# Altium PCB NFC.PcbDoc
Units mm, origin at the board's own origin, x right, y up, seen from the top; angles counter-clockwise.
Board outline 47.5 x 62.6 mm, 4 copper layers (Top Layer, GND, PWR, Bottom Layer), stack 1.62 mm thick; 51 components, 34 nets, 153 pads, 64 vias.
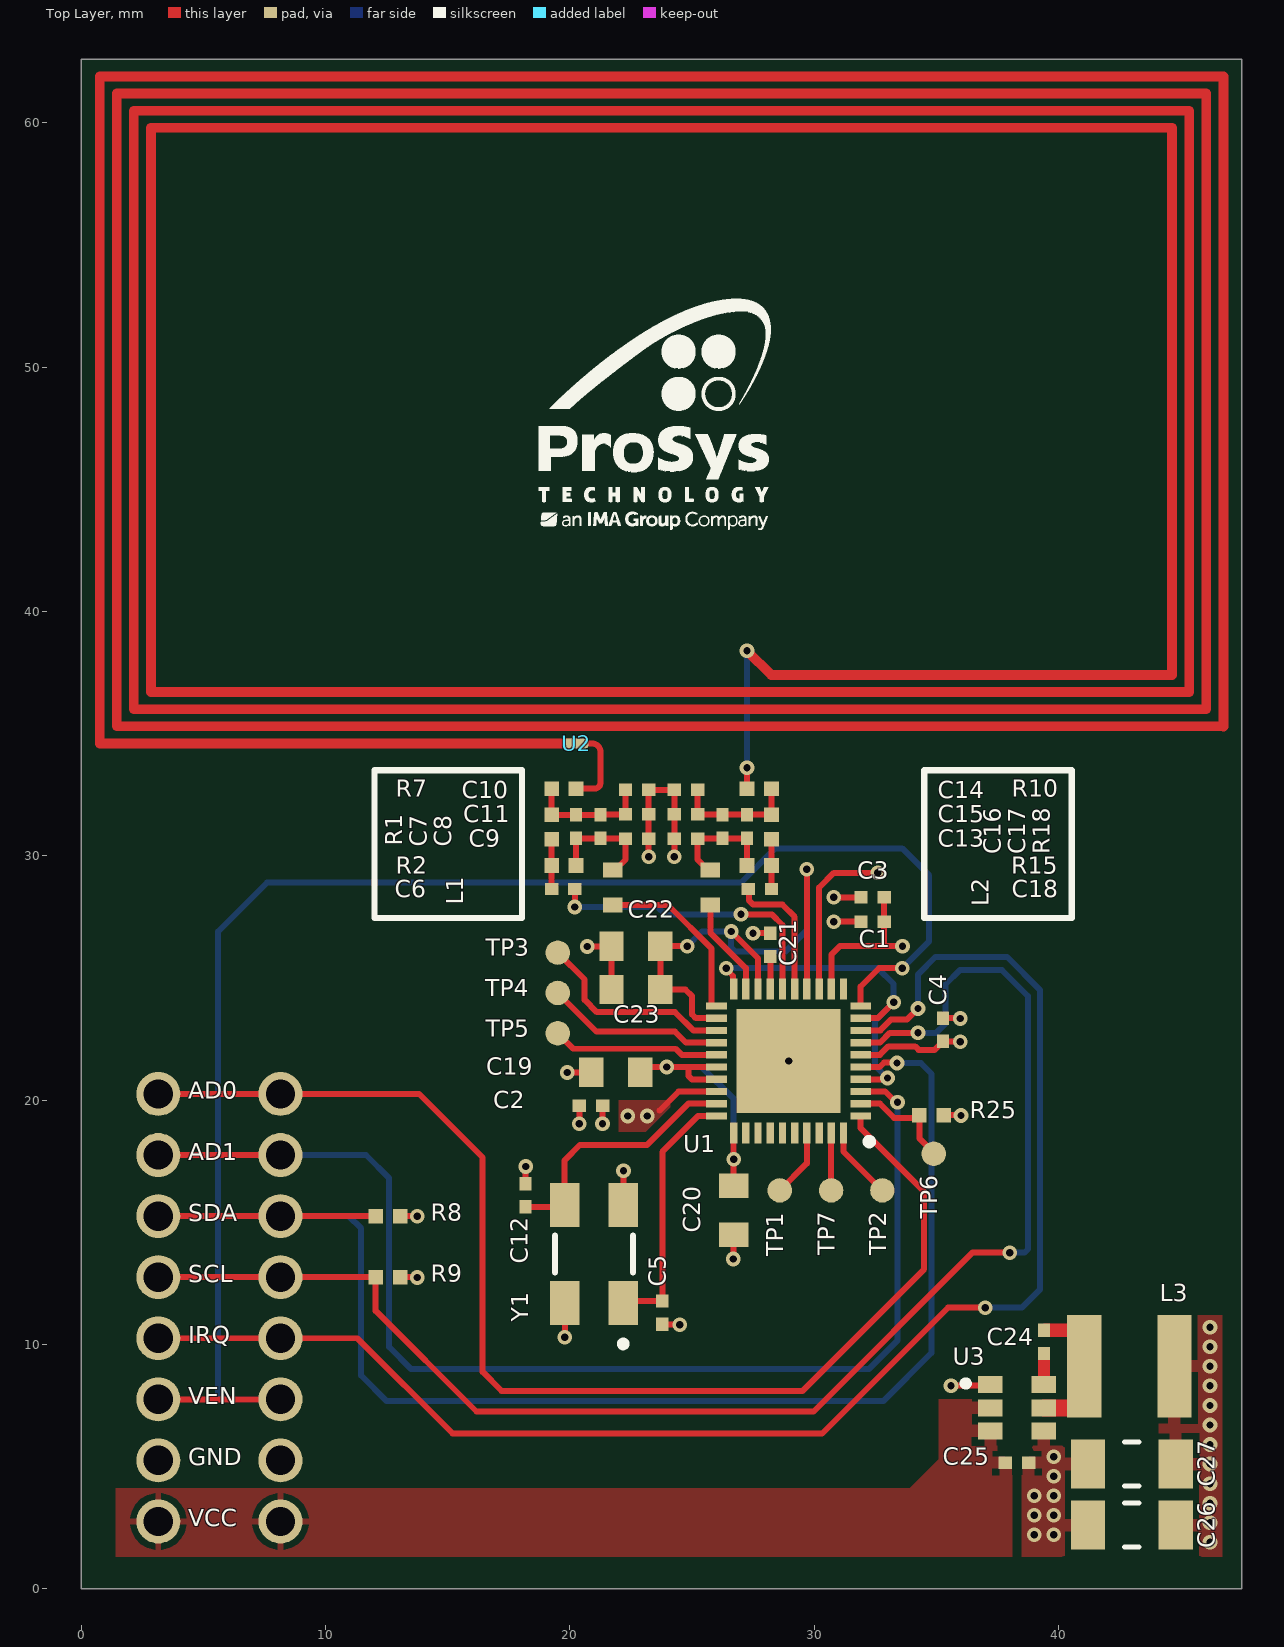
[diagram p0: Top Layer view]
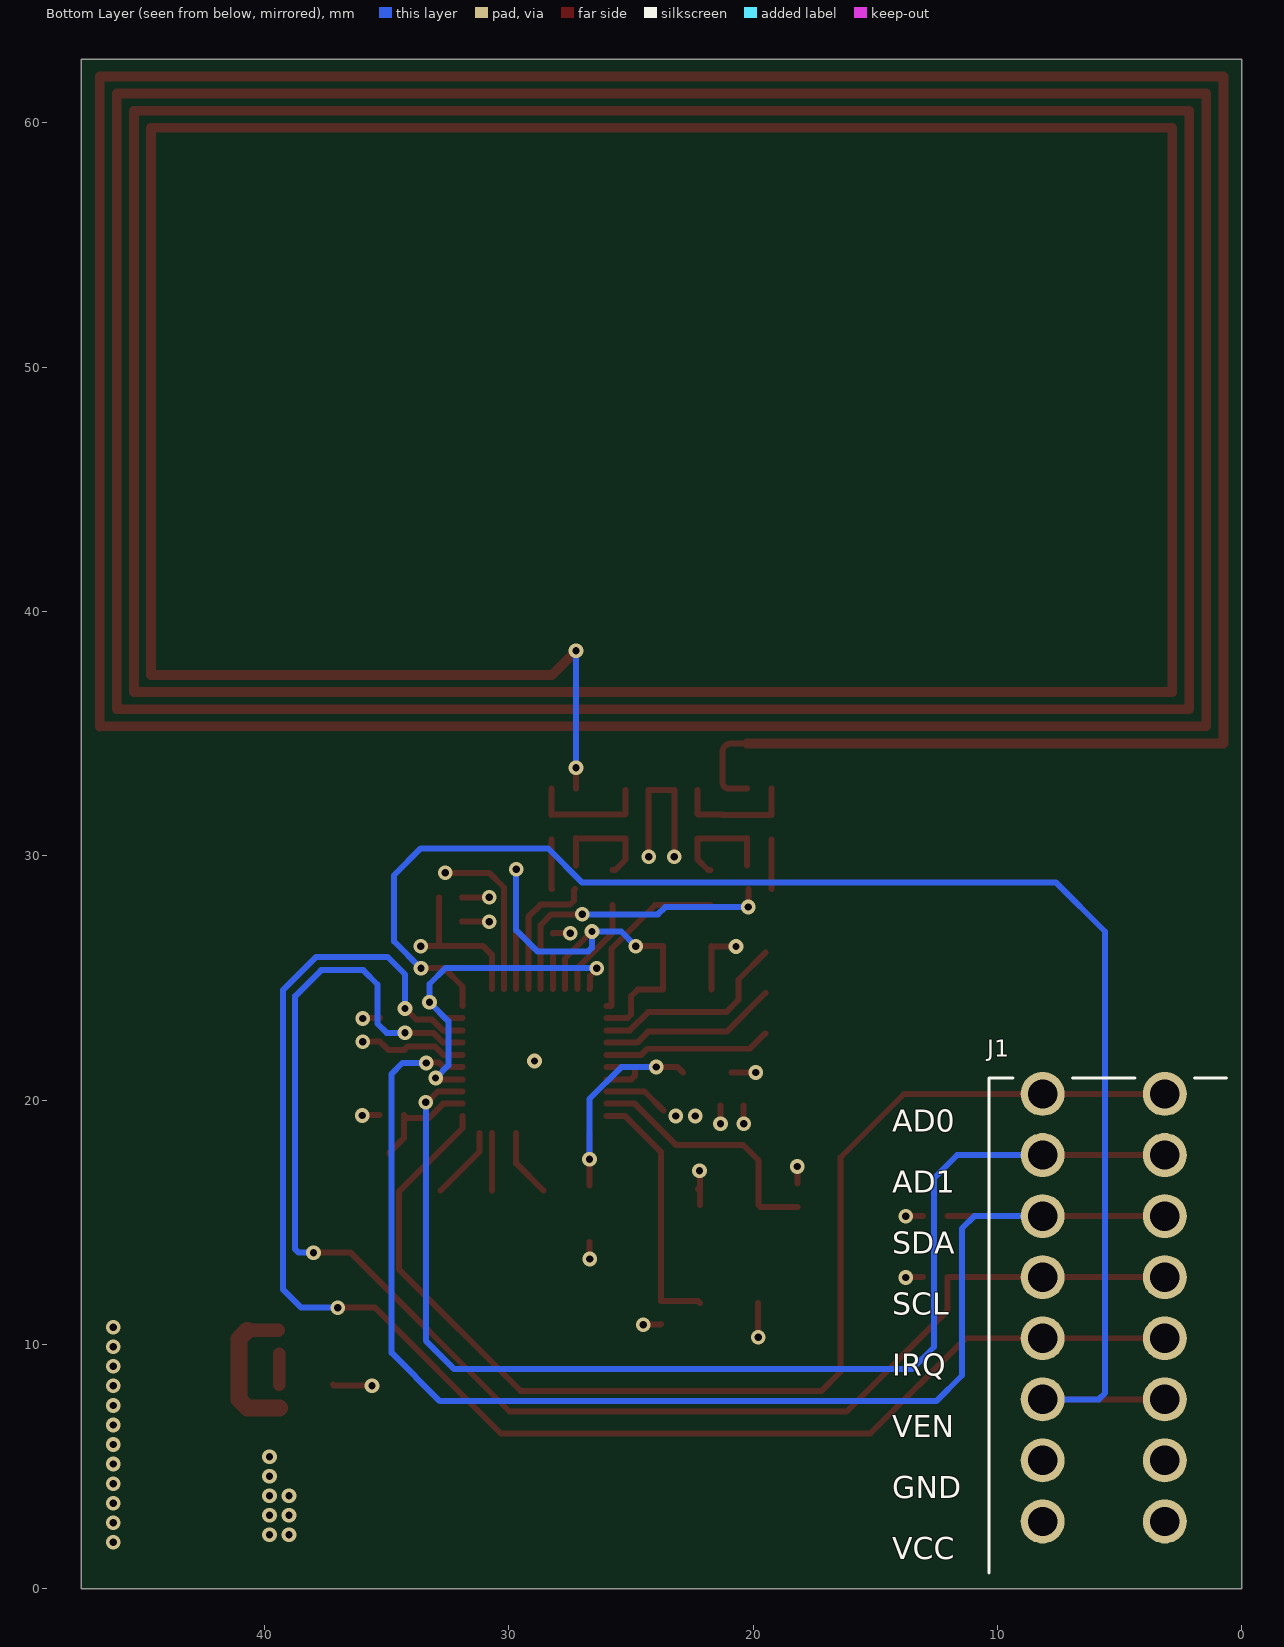
[diagram p1: Bottom Layer view, seen from below]
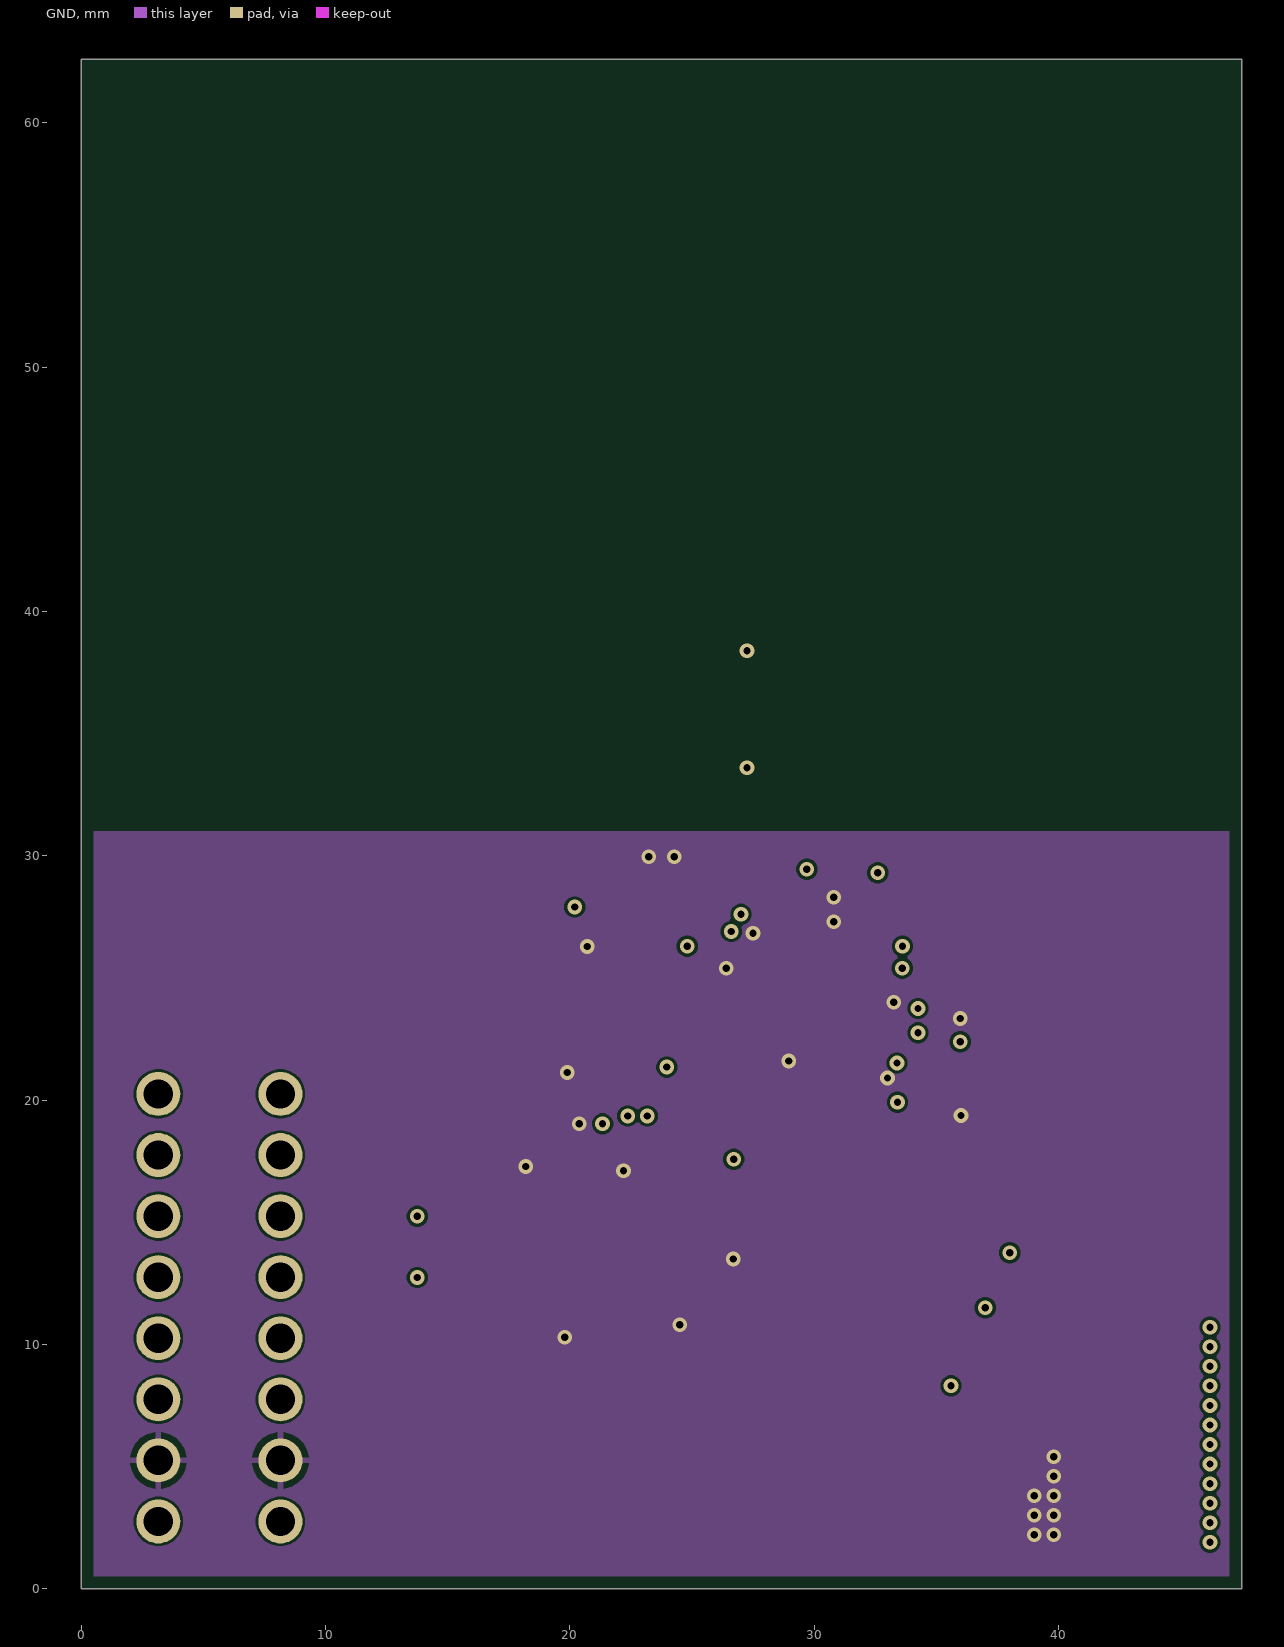
[diagram p2: GND]
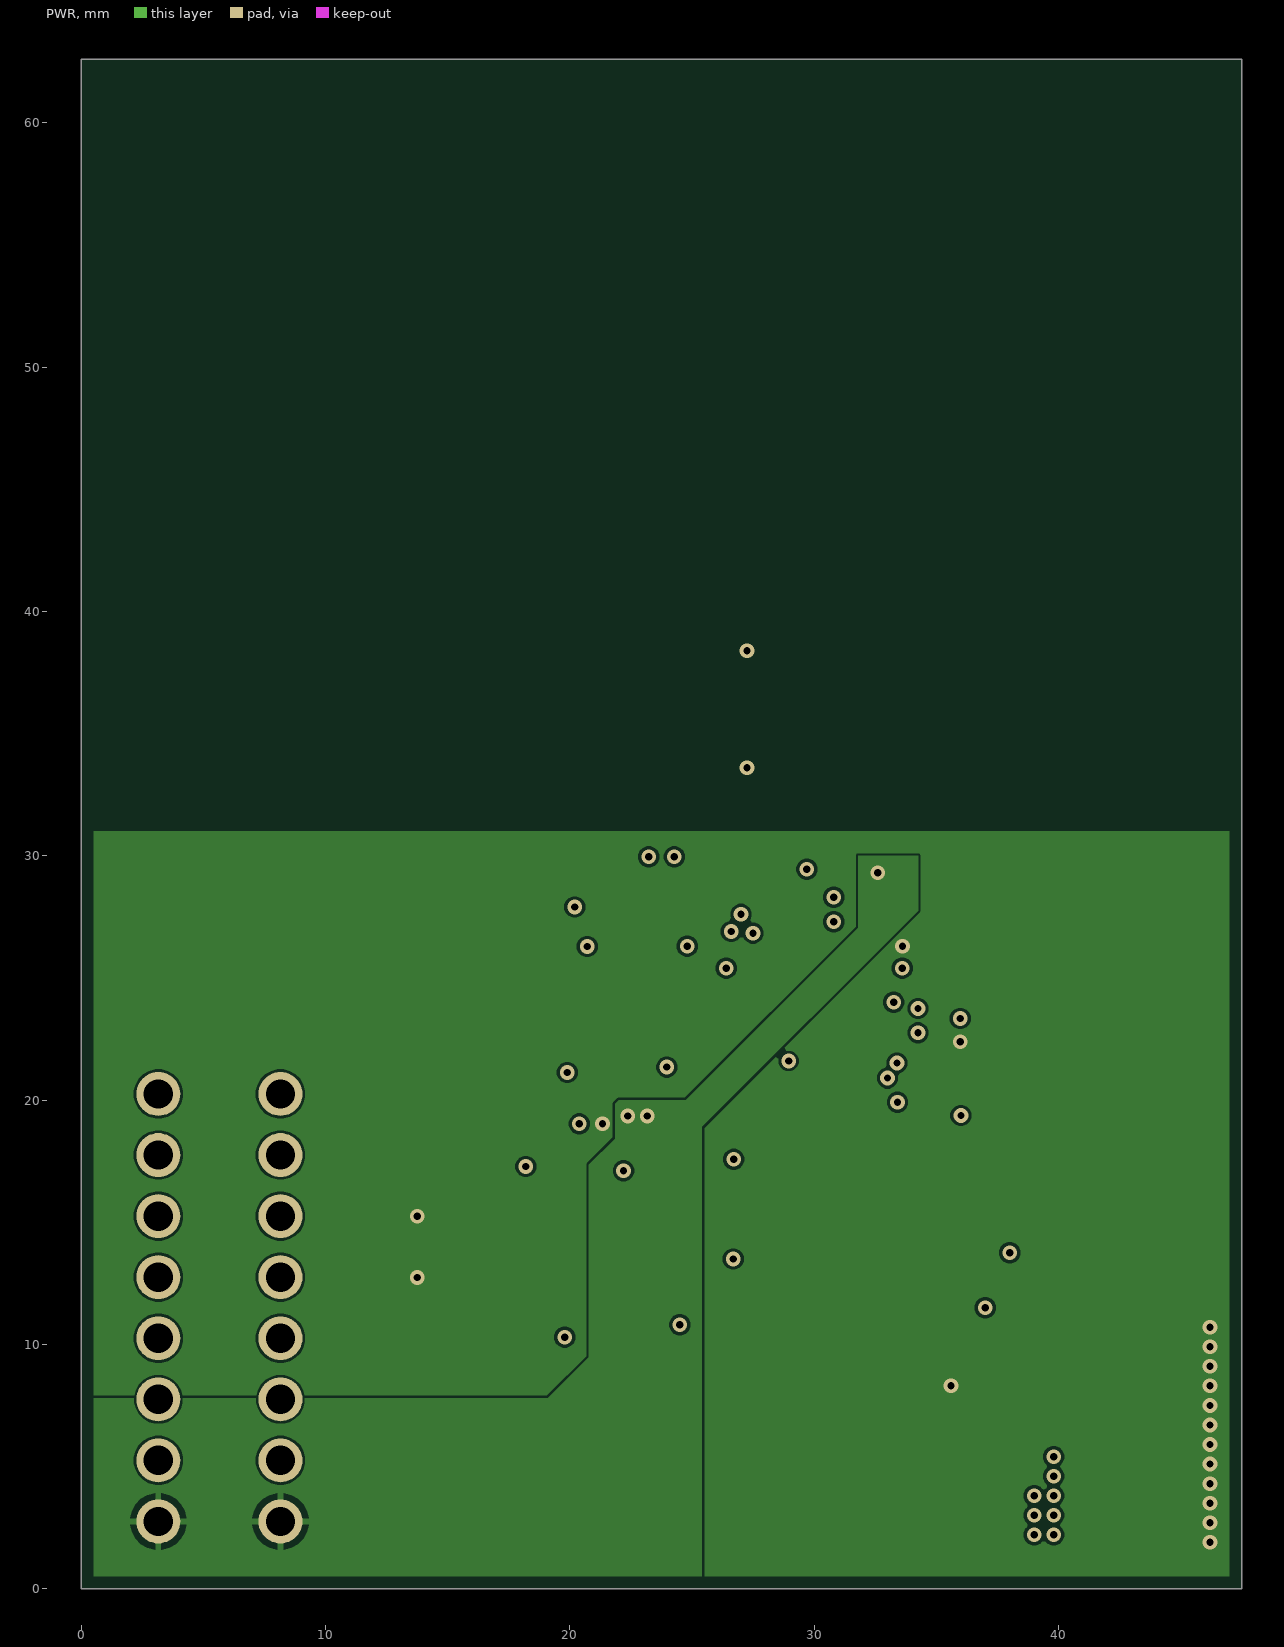
[diagram p3: PWR]
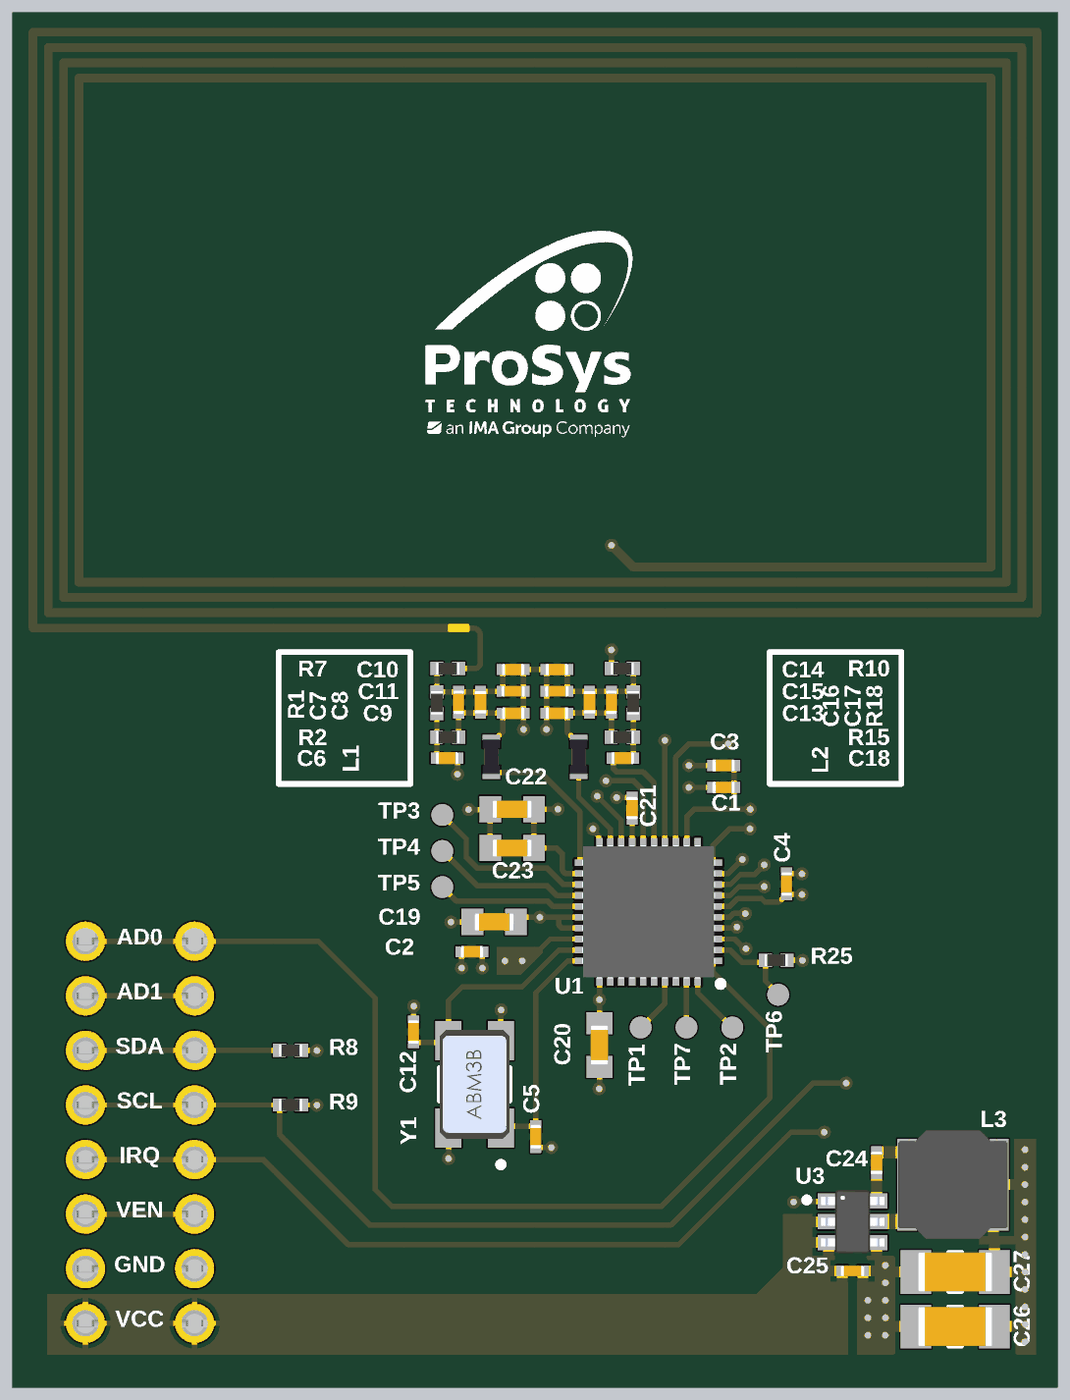
[diagram p4: 3D render of the assembled board from above, using the file's embedded part models]

## Layer stack, top to bottom
Top Solder: solder mask 0.0102, Solder Resist, Dk 3.5
Top Layer: signal copper 0.035
Dielectric 4: prepreg 0.07, PP-006, Dk 4.1
Dielectric 2: prepreg 0.07, PP-006, Dk 4.1
GND: signal copper 0.035
Dielectric 1: core 1.2, FR-4, Dk 4.8
PWR: signal copper 0.035
Dielectric 3: prepreg 0.07, PP-006, Dk 4.1
Dielectric 5: prepreg 0.07, PP-006, Dk 4.1
Bottom Layer: signal copper 0.035
Bottom Solder: solder mask 0.0102, Solder Resist, Dk 3.5

## Board outline
0,0 47.5,0 47.5,62.6 0,62.6

## Design rules (kind name [scope] priority, off if disabled: settings)
BoardOutlineClearance [All] p1: gap=0.5 ignorepadtopadclearanceinfootprint=FALSE
Clearance [All] p1: gap=0.102 ignorepadtopadclearanceinfootprint=FALSE except(0.127: Arc-Via Track-Via SMDPad-Via THPad-Via Via-Via Via-Fill Via-Poly Via-Region Via-Text; 0.25: Arc-Hole Track-Hole SMDPad-Hole THPad-Hole Via-Hole Fill-Hole Poly-Hole Region-Hole Text-Hole)
ComponentClearance [All] p1: gap=0.102 collisioncheckmode=3 verticalgap=0.102 showdistances=TRUE
DiffPairsRouting [All] p1: maxlimit=0.102 minlimit=0.102 mostfreqgap=0.102 toplayer_minwidth=0.102 toplayer_maxwidth=1816.048 toplayer_prefwidth=0.102 midlayer1_minwidth=0.102 midlayer1_maxwidth=1816.048 midlayer1_prefwidth=0.102 midlayer2_minwidth=0.102 midlayer2_maxwidth=1816.048 midlayer2_prefwidth=0.102 bottomlayer_minwidth=0.102 bottomlayer_maxwidth=1816.048 bottomlayer_prefwidth=0.102 maxuncoupledlength=12.7
Height [All] p1: minheight=0 maxheight=1816.048 prefheight=12.7
HoleSize [All] p1: absolutevalues=TRUE maxlimit=6.3 minlimit=0.2 maxpercent=80.000 minpercent=20.000
HoleToHoleClearance [All] p1: gap=0.25 allowstackedmicrovias=FALSE
MinimumAnnularRing [All] p1: minimumring=0.076
MinimumSolderMaskSliver [All] p1: minsoldermaskwidth=0
NetAntennae [Not (InNet('GND') AND IsVia)] p1: netantennaetolerance=0
PlaneClearance [All] p1: clearance=0.102
PlaneConnect PlaneConnectPowerPads [InPadClass('PowerPads')] p1: planeconnectstyle=Direct reliefexpansion=0.508 reliefentries=4 reliefconductorwidth=0.254 reliefairgap=0.254
PlaneConnect [All] p2: pad.planeconnectstyle=Relief pad.reliefexpansion=0.3 pad.reliefentries=4 pad.reliefconductorwidth=0.102 pad.reliefairgap=0.102 via.planeconnectstyle=Direct via.reliefexpansion=0.3 via.reliefentries=4 via.reliefconductorwidth=0.127 via.reliefairgap=0.127
PolygonConnect PolygonConnectPowerPads [All vs (InPadClass('PowerPads'))] p1: connectstyle=Direct reliefconductorwidth=0.254 reliefentries=4 polygonreliefangle="90 Angle" airgapwidth=0.254
PolygonConnect [All] p2: thpad.connectstyle=Relief thpad.reliefconductorwidth=0.102 thpad.reliefentries=4 thpad.polygonreliefangle="90 Angle" thpad.airgapwidth=0.102 smdpad.connectstyle=Relief smdpad.reliefconductorwidth=0.102 smdpad.reliefentries=4 smdpad.polygonreliefangle="90 Angle" smdpad.airgapwidth=0.102 via.connectstyle=Direct via.reliefconductorwidth=0.127 via.reliefentries=4 via.polygonreliefangle="90 Angle" via.airgapwidth=0.127
RoutingVias [All] p1: holewidth=0.2 width=0.45 viastyle="Through Hole" minholewidth=0.2 minwidth=0.45 maxholewidth=6.3 maxwidth=6.55
SilkToSilkClearance [All] p1: silktosilkclearance=0
SilkToSolderMaskClearance [IsPad] p1: minsilkscreentomaskgap=0.102 clearancetoexposedcopper=TRUE
SolderMaskExpansion [All] p1: expansion=0.075 istentingtop=FALSE
Width Width_50OHM [All] p1: maxlimit=4 minlimit=0.245 preferedwidth=0.254 toplayer_prefwidth=0.245 bottomlayer_prefwidth=0.245 impedanceprofiledriven=TRUE impedanceprofileid={5BB88E57-C79A-49EB-8908-6D6DCFCD8884} impedanceprofilevalue=50.000000 minimp=50.000000 maximp=50.000000 favimp=50.000000
Width [All] p2: maxlimit=1816.048 minlimit=0.102 preferedwidth=0.102
19 further rules are at their usual default settings.

## Classes and differential pairs
net class 50OHM: GND NetC5_2 NetC6_1 NetC6_2 NetC7_1 NetC7_2 NetC12_1 NetC13_1 NetC14_1 NetC18_1 NetC18_2 NetL1_1 NetL2_1

## Components (designator, comment, footprint, x,y, rotation, side; value= is the part's Value field where it differs from the comment)
C1 "4u7 6V3" CAPC1005X05N_MURATA_GRT 32.39,27.3 r0 top locked
C2 "100nF 50V" CAPC1005X05N_MURATA_GCM 20.861,19.769 r0 top locked
C3 "4u7 6V3" CAPC1005X05N_MURATA_GRT 32.39,28.3 r0 top locked
C4 "1uF 50V" CAPC1005X05N_MURATA_GRM 35.275,22.875 r270 top locked
C5 "10pF 50V" CAPC1005X05N_MURATA_GRM 23.783,11.3 r90 top locked
C6 "1n 50V" CAPC1005X05N_MURATA_GCM 19.725,28.64 r180 top locked
C7 "10pF 50V" CAPC1005X05N_MURATA_GRM 20.25,31.2 r90 top locked
C8 "68p 1%" CAPC1005X05N_MURATA_GCM 21.25,31.2 r90 top locked
C9 "330p 1%" CAPC1005X05N_MURATA_GCM 22.75,30.7 r180 top locked
C10 "68p 1%" CAPC1005X05N_MURATA_GCM 22.75,32.7 r180 top locked
C11 "10pF 50V" CAPC1005X05N_MURATA_GRM 22.75,31.7 r180 top locked
C12 "10pF 50V" CAPC1005X05N_MURATA_GRM 18.183,16.1 r90 top locked
C13 "330p 1%" CAPC1005X05N_MURATA_GCM 24.75,30.7 r180 top locked
C14 "68p 1%" CAPC1005X05N_MURATA_GCM 24.75,32.7 r180 top locked
C15 "10pF 50V" CAPC1005X05N_MURATA_GRM 24.75,31.7 r180 top locked
C16 "68p 1%" CAPC1005X05N_MURATA_GCM 26.25,31.2 r270 top locked
C17 "10pF 50V" CAPC1005X05N_MURATA_GRM 27.25,31.2 r270 top locked
C18 "1n 50V" CAPC1005X05N_MURATA_GCM 27.775,28.64 r0 top locked
C19 "2u2 50V" CAPC1608X08N_MURATA_GRT 21.877,21.136 r0 top locked
C20 "2u2 50V" CAPC1608X08N_MURATA_GRT 26.7,15.494 r90 top locked
C21 "100nF 50V" CAPC1005X05N_MURATA_GCM 28.2,26.35 r270 top locked
C22 "2u2 50V" CAPC1608X08N_MURATA_GRT 22.7,26.3 r0 top locked
C23 "2u2 50V" CAPC1608X08N_MURATA_GRT 22.7,24.522 r0 top locked
C24 "100nF 50V" CAPC1005X05N_MURATA_GCM 39.4,10.1 r90 top
C25 "1uF 50V" CAPC1005X05N_MURATA_GRM 38.3,5.15 r180 top
C26 "22u 10V" CAPC3216X18N_MURATA_GCM 43,2.6 r0 top
C27 "22u 10V" CAPC3216X18N_MURATA_GCM 43,5.1 r0 top
J1 "1770940" 1770940 8.15,2.75 r90 bottom
L1 "160nH 1A" LQW18 21.75,28.7 r90 top locked
L2 "160nH 1A" LQW18 25.75,28.7 r90 top locked
L3 "3.9uH 3.7A" IFSC2020DZER3R9N01 42.9,9.1 r0 top
R1 "0R" RESC1005X04N_YAGEO_RC 19.25,31.175 r90 top locked
R2 "2K2 1%" RESC1005X04N_YAGEO_RC 19.75,29.6 r0 top locked
R7 "3R32 1%" RESC1005X04N_YAGEO_RC 19.75,32.748 r0 top locked
R8 "2K2 1%" RESC1005X04N_YAGEO_RC 12.55,15.25 r180 top
R9 "2K2 1%" RESC1005X04N_YAGEO_RC 12.55,12.75 r180 top
R10 "3R32 1%" RESC1005X04N_YAGEO_RC 27.75,32.748 r180 top locked
R15 "2K2 1%" RESC1005X04N_YAGEO_RC 27.75,29.6 r0 top locked
R18 "0R" RESC1005X04N_YAGEO_RC 28.25,31.175 r90 top locked
R25 "10k 1%" RESC1005X04N_YAGEO_RC 34.8,19.38 r180 top locked
TP1 "Test Point 1mm" "Test Point 1mm" 28.59,16.3 r90 top locked
TP2 "Test Point 1mm" "Test Point 1mm" 32.79,16.3 r90 top locked
TP3 "Test Point 1mm" "Test Point 1mm" 19.502,26.035 r90 top locked
TP4 "Test Point 1mm" "Test Point 1mm" 19.502,24.384 r90 top locked
TP5 "Test Point 1mm" "Test Point 1mm" 19.502,22.733 r90 top locked
TP6 "Test Point 1mm" "Test Point 1mm" 34.89,17.8 r90 top locked
TP7 "Test Point 1mm" "Test Point 1mm" 30.69,16.3 r90 top locked
U1 "PN7160A1HN/C100E" QFN50P600X600X100-41N-D 28.95,21.6 r180 top locked
U2 "NFC ANTENNA 46x27 4 TURN" "NFC ANTENNA 46x27 4TURN" 23.75,48.25 r0 top locked
U3 "AP63203WU-7" TSOT-26-6 38.3,7.4 r0 top
Y1 "27.120MHz Crystal" ABM3B 20.983,13.7 r90 top locked

## Footprints (in the part's own frame and the unit in brackets; to place one, negate y for a bottom-side part, rotate by r counter-clockwise, add the part's x,y. Pads: shape width x height; smd on the part's side, far side on the other; paste and mask are expansions set on the pad)
1770940 [mm]
  round 1.8 hole 1.2: 1(0,-5) 1(0,0) 2(2.5,-5) 2(2.5,0) 3(5,-5) 3(5,0) 4(7.5,-5) 4(7.5,0) 5(10,-5) 5(10,0) 6(12.5,-5) 6(12.5,0) 7(15,-5) 7(15,0) 8(17.5,-5) 8(17.5,0)
  silkscreen extent -2.11,-7.52 18.15,2.2, body extent -2.36,-7.8 18.16,2.2, height 5.01
ABM3B [mm]
  rect 1.8x1.2 smd: 1(-2,-1.2) 2(2,-1.2) 3(2,1.2) 4(-2,1.2)
  silkscreen extent -3.74,-1.6 0.75,1.6, body extent -2.5,-1.6 2.5,1.6, height 1.1
CAPC1005X05N_MURATA_GCM [mm] "Chip Capacitor, 2-Leads, Body 1.00x0.50mm, IPC Medium Density,MURATA,GCM"
  rect 0.55x0.5 smd: 1(-0.475,0) 2(0.475,0)
  body extent -0.53,-0.28 0.53,0.28, height 0.5
CAPC1005X05N_MURATA_GRM [mm] "Chip Capacitor, 2-Leads, Body 1.00x0.50mm, IPC Medium Density,MURATA,GRM"
  rect 0.55x0.5 smd: 1(-0.475,0) 2(0.475,0)
  body extent -0.55,-0.25 0.55,0.25, height 0.41
CAPC1005X05N_MURATA_GRT [mm] "Chip Capacitor, 2-Leads, Body 1.00x0.50mm, IPC Medium Density,MURATA,GRT"
  rect 0.55x0.5 smd: 1(-0.475,0) 2(0.475,0)
  body extent -0.53,-0.28 0.53,0.28, height 0.5
CAPC1608X08N_MURATA_GRT [mm] "Chip Capacitor, 2-Leads, Body 1.60x0.80mm, IPC Medium Density,MURATA,GRM"
  rect 1x1.2 smd: 1(-1,0) 2(1,0)
  body extent -0.9,-0.4 0.9,0.4, height 0.61
CAPC3216X18N_MURATA_GCM [mm] "Chip Capacitor, 2-Leads, Body 3.20x1.60mm, IPC Medium Density,Murata,GCM"
  rect 1.4x2 smd: 1(-1.8,0) 2(1.8,0)
  silkscreen extent -0.3,-0.9 0.3,0.9, body extent -1.7,-0.9 1.7,0.9, height 1.8
IFSC2020DZER3R9N01 [mm]
  rect 1.4x4.2 smd: 1(-1.85,0) 2(1.85,0)
  body extent -2.5,-2.5 2.5,2.5, height 4.01
LQW18 [mm]
  rect 0.6x0.8 smd: 1(-0.715,0) 2(0.715,0)
  body extent -0.8,-0.4 0.8,0.4, height 0.95
"NFC ANTENNA 46x27 4TURN" [mm]
  rrect50% 1x0.4 smd paste-2539.97 mask+0: 1(-3.501,-13.652)
  Top Layer lines w0.4: -3.501,-13.652 -23.001,-13.652 -23.001,13.648 22.999,13.648 22.999,-12.963 ; 3.5,-9.86 4.492,-10.852 20.899,-10.852 20.899,11.548 -20.901,11.548 -20.901,-11.552 21.599,-11.552 21.599,12.248 -21.601,12.248 -21.601,-12.252 22.299,-12.252 22.299,12.948 -22.301,12.948 -22.301,-12.952 22.999,-12.952
QFN50P600X600X100-41N-D [mm]
  rect 0.85x0.3 smd mask+0.11: 1(-2.95,2.25) 2(-2.95,1.75) 3(-2.95,1.25) 4(-2.95,0.75) 5(-2.95,0.25) 6(-2.95,-0.25) 7(-2.95,-0.75) 8(-2.95,-1.25) 9(-2.95,-1.75) 10(-2.95,-2.25) 21(2.95,-2.25) 22(2.95,-1.75) 23(2.95,-1.25) 24(2.95,-0.75) 25(2.95,-0.25) 26(2.95,0.25) 27(2.95,0.75) 28(2.95,1.25) 29(2.95,1.75) 30(2.95,2.25)
  rect 0.3x0.85 smd mask+0.11: 11(-2.25,-2.95) 12(-1.75,-2.95) 13(-1.25,-2.95) 14(-0.75,-2.95) 15(-0.25,-2.95) 16(0.25,-2.95) 17(0.75,-2.95) 18(1.25,-2.95) 19(1.75,-2.95) 20(2.25,-2.95) 31(2.25,2.95) 32(1.75,2.95) 33(1.25,2.95) 34(0.75,2.95) 35(0.25,2.95) 36(-0.25,2.95) 37(-0.75,2.95) 38(-1.25,2.95) 39(-1.75,2.95) 40(-2.25,2.95)
  rect 4.25x4.25 smd paste-2539.97 mask+0.11: 41(0,0)
  silkscreen extent -3.43,3.18 -3.18,3.43, body extent -3.05,-3.05 3.05,3.05, height 1
RESC1005X04N_YAGEO_RC [mm] "Chip Resistor, 2-Leads, Body 1.00x0.50mm, IPC Medium Density,YAGEO,RC"
  rect 0.6x0.6 smd: 1(-0.5,0) 2(0.5,0)
  body extent -0.53,-0.28 0.53,0.28, height 0.4
"Test Point 1mm" [mm]
  round 1 smd: 1(0,0)
TSOT-26-6 [mm] "SOT23, 6-Leads, Body 2.90x2.80mm, Pitch 0.95mm, IPC Medium Density"
  rect 1x0.7 smd: 1(-1.1,0.95) 2(-1.1,0) 3(-1.1,-0.95) 4(1.1,-0.95) 5(1.1,0) 6(1.1,0.95)
  silkscreen extent -2.22,0.88 -1.97,1.12, body extent -1.45,-1.45 1.45,1.45, height 1

## Part data
C1 C3: "Multilayer Ceramic Capacitors MLCC - SMD/SMT 4.7 uF 6.3 VDC 20% 0402 X6S AEC-Q200", Manufacturer=MURATA, MPN=GRT155C80J475ME13D, Supplier MPN=81-GRT155C80J475ME13, Suppplier=Mouser
C2 C21 C24: "Multilayer Ceramic Capacitors MLCC - SMD/SMT 0.1 uF 50 VDC 10% 0402 X7R AEC-Q200", Manufacturer=MURATA, MPN=GCM155R71H104KE02D, Supplier MPN=81-GCM155R71H104KE2D, Suppplier=Mouser
C4 C25: "Multilayer Ceramic Capacitors MLCC - SMD/SMT 1 uF 50 VDC 10% 0402 X5R", Manufacturer=MURATA, MPN=GRM155R61H105KE05D, Supplier MPN=81-GRM155R61H105KE5D, Suppplier=Mouser
C5 C7 C11 C12 C15 C17: "Multilayer Ceramic Capacitors MLCC - SMD/SMT 10 pF 50 VDC 2% 0402 C0G (NP0)", Manufacturer=MURATA, MPN=GRM1555C1H100GA01D, Supplier MPN=81-GRM1555C1H100GA1D, Suppplier=Mouser
C6 C18: "Multilayer Ceramic Capacitors MLCC - SMD/SMT 1000 pF 50 VDC 2% 0402 C0G (NP0) AEC-Q200", Manufacturer=MURATA, MPN=GCM1555C1H102GA16J, Supplier MPN=81-GCM1555C1H102GA6J, Suppplier=Mouser
C8 C10 C14 C16: "Multilayer Ceramic Capacitors MLCC - SMD/SMT 0402 100VDC 68pF 5% C0G AEC-Q200", Manufacturer=MURATA, MPN=GCM1555C2A680JE02D, Supplier MPN=81-GCM1555C2A680JE2D, Suppplier=Mouser
C9 C13: "Multilayer Ceramic Capacitors MLCC - SMD/SMT 0402 100VDC 330pF 5% C0G AEC-Q200", Manufacturer=MURATA, MPN=GCM1555C2A331JE02D, Supplier MPN=81-GCM1555C2A331JE2D, Suppplier=Mouser
C19 C20 C22 C23: "Multilayer Ceramic Capacitors MLCC - SMD/SMT 2.2 uF 50 VDC 10% 0603 X5R AEC-Q200", Manufacturer=MURATA, MPN=GRT188R61H225KE13D, Supplier MPN=81-GRT188R61H225KE3D, Suppplier=Mouser
C26 C27: "Multilayer Ceramic Capacitors MLCC - SMD/SMT 22 uF 10 VDC 10% 1206 X7R AEC-Q200", Manufacturer=MURATA, MPN=GCM31CR71A226KE02L, Supplier MPN=81-GCM31CR71A226KE2L, Suppplier=Mouser
J1: "Fixed Terminal Blocks PTSM 0,5/ 8-2,5-H THR R32", Manufacturer="Phoenix Contact", MPN=1770940, Supplier=Mouser, Supplier PN=651-1770940
L1 L2: "RF Inductors - SMD 160nH 1000mA AEC-Q200", Manufacturer="Murata Electronics", MPN=LQW18CNR16J0HD, Supplier=Mouser, Supplier PN=81-LQW18CNR16J0HD
L3: "Power Inductors - SMD 3.9UH 3.7A 35 MOHM SMD", Manufacturer="Vishay / Dale", MPN=IFSC2020DZER3R9N01, Supplier=Mouser, Supplier PN=70-IFSC2020DZR3R9N01
R1 R18: "Thick Film Resistors - SMD General Purpose Chip Resistor 0402, 0Ohms, 1%, 1/16W", Manufacturer=YAGEO, MPN=RC0402FR-070RL, Supplier=Mouser, Supplier PN=603-RC0402FR-070RL
R2 R8 R9 R15: "Thick Film Resistors - SMD General Purpose Chip Resistor 0402, 2.2kOhms, 5%, 1/16W", Manufacturer=YAGEO, MPN=RC0402JR-7D2K2L, Supplier=Mouser, Supplier PN=603-RC0402JR-7D2K2L
R7 R10: "Thick Film Resistors - SMD General Purpose Chip Resistor 0402, 3.32Ohms, 1%, 1/16W", Manufacturer=YAGEO, MPN=RC0402FR-073R32L, Supplier=Mouser, Supplier PN=603-RC0402FR-073R32L
R25: "Thick Film Resistors - SMD General Purpose Chip Resistor 0402, 10kOhms, 1%, 1/16W", Manufacturer=YAGEO, MPN=RC0402FR-0710KL, Supplier=Mouser, Supplier PN=603-RC0402FR-0710KL
U1: library part PN7160A1HN/C100E_1, "NFC/RFID Tags & Transponders NFC Plug and Play Controller with Integrated Firmware and NCI Interface", Manufacturer="NXP Semiconductors", Supplier MPN=771-PN7160A1HN/C100E, MPN=PN7160A1HN/C100E, Supplier=Mouser
U2: Manufacturer=None, MPN="NFC ANTENNA 46x27 4 TURN", Supplier=None, Supplier MPN="NFC ANTENNA 46x27 4 TURN"
U3: "Switching Voltage Regulators DCDC Conv HV Buck TSOT26 T&R 3K 3V3 OUT", Manufacturer="Diodes Incorporated", MPN=AP63203WU-7, Supplier=Mouser, Supplier PN=621-AP63203WU-7
Y1: "Crystals 27.12 MHZ 10PF 10PPM -40+85C", Manufacturer=ABRACON, MPN=ABM3B-27.120MHZ-10-D1G-T, Supplier MPN=815-ABM3B-27.110D1GT, Supplier=Mouser

## Via types
v1: diameter 0.6, hole 0.3, Top Layer to Bottom Layer, tented both sides, 64 vias

## Nets (pads, with @x,y where several pads share a name; then routed paths per layer and width w, separated by ;. In a path a pad name is that pad's centre, name@x,y a point inside that pad or via, vN(x,y) a via of type N, cw(c..) or ccw(c..) an arc to the next point about the centre after c; other vN are vias at no path point)
+3V3: C1.2 C2.2 C3.2 C4.2 C26.2 C27.2 L3.2 R8.1 R9.1 U1.6 U1.12 U3.1 | length 14.6
  Top Layer w0.245: R9.1 v1@13.742,12.75 ; R8.1 v1@13.742,15.25 ; v1(21.336,19.024) C2.2 ; U1.12 30.7,25.95 31.05,26.3 v1(33.611,26.3) ; U1.6 32.683,21.85 33.033,22.2 34.131,22.2 34.275,22.056 34.931,22.056 35.123,22.248 35.148,22.248 35.275,22.375 C4.2 v1@35.967,22.4 ; 32.865,26.3 C1.2 C3.2 ; v1(35.6,8.3) 35.625,8.325 37.175,8.325 U3.1
  other v1: 46.2,1.9 46.2,2.7 46.2,3.5 46.2,4.3 46.2,5.1 46.2,5.9 46.2,6.7 46.2,7.5 46.2,8.3 46.2,9.1 46.2,9.9 46.2,10.7 13.754,12.737 13.754,15.237 35.979,22.387
GND: C1.1 C2.1 C3.1 C4.1 C5.1 C9.1 C10.1 C11.1 C12.2 C13.2 C14.2 C15.2 C19.1 C20.1 C21.1 C22.1 C23.1 C25.1 C26.1 C27.1 J1.2 R25.1 U1.4 U1.9 U1.20 U1.41 U3.4 Y1.2 Y1.4 | length 35.6
  Top Layer w0.245: C12.2 18.183,17.267 v1(18.195,17.279) ; v1(19.787,10.296) 19.8,10.308 Y1.4@19.8,11.7 ; v1(19.896,21.126) 20.867,21.126 C19.1 ; v1(20.386,19.024) C2.1 ; v1(20.705,26.286) 21.686,26.286 C22.1 C23.1 ; Y1.2 22.183,17.092 v1(22.195,17.104) ; Y1.2@22.2,16.4 Y1.2@22.25,16.35 ; v1(23.225,29.954) C9.1 C11.1 C10.1 C14.2 C15.2 C13.2 v1(24.275,29.954) ; C5.1 23.795,10.812 24.487,10.812 v1(24.499,10.8) ; v1(26.4,25.4) 26.4,25.351 26.673,25.079 26.673,24.577 U1.20 ; v1(26.687,13.496) 26.7,13.508 C20.1@26.7,14.2 ; v1(27.492,26.834) 27.496,26.83 28.195,26.83 C21.1 ; v1(30.8,27.3) C1.1 ; v1(30.8,28.3) C3.1 ; U1.4 32.95,20.85 v1(33,20.9) ; U1.9 32.6,23.35 v1(33.25,24) ; C4.1 v1@35.967,23.35 ; R25.1 v1@35.992,19.38
  Bottom Layer w0.245: v1(26.4,25.4) 32.6,25.4 33.25,24.75 v1(33.25,24) 32.48,23.23 32.48,21.42 v1(33,20.9)
  other v1: 39,2.2 39.8,2.2 39,3 39.8,3 39,3.8 39.8,3.8 39.8,4.6 39.8,5.4 36.004,19.367 28.95,21.6 35.979,23.337
I2C_ADR0: J1.8 U1.1 | length 50.9
  Top Layer w0.245: J1.8@3.15,20.25 8.15,20.25 13.825,20.25 16.425,17.65 16.425,8.875 17.2,8.1 29.525,8.1 34.5,13.075 34.5,16.25 31.9,18.85 U1.1
I2C_ADR1: J1.7 U1.3 | length 49.9
  Top Layer w0.245: J1.7@3.15,17.75 J1.7@8.15,17.75 ; U1.3 32.905,20.35 33.346,19.909 v1(33.408,19.909)
  Bottom Layer w0.245: J1.7@8.15,17.75 11.65,17.75 12.6,16.8 12.6,9.892 13.504,8.987 32.237,8.987 33.4,10.15 33.4,19.901 v1(33.408,19.909)
I2C_SCL: J1.5 R9.2 U1.7 | length 61.3
  Top Layer w0.245: J1.5@3.15,12.75 8.15,12.75 R9.2 12.05,11.375 16.175,7.25 29.975,7.25 36.475,13.75 v1(38,13.75) ; U1.7 32.693,22.35 33.093,22.75 v1(34.25,22.75)
  Bottom Layer w0.245: v1(34.25,22.75) 35,22.75 35.375,23.125 35.375,24.73 35.96,25.315 37.685,25.315 38.75,24.25 38.75,13.894 38.606,13.75 v1(38,13.75)
I2C_SDA: J1.6 R8.2 U1.5 | length 57.6
  Top Layer w0.245: J1.6@3.15,15.25 8.15,15.25 R8.2 ; U1.5 32.673,21.35 32.855,21.532 33.371,21.532 v1(33.388,21.515)
  Bottom Layer w0.245: J1.6@8.15,15.25 10.95,15.25 11.45,14.75 11.45,8.725 12.5,7.675 32.825,7.675 34.8,9.65 34.8,21.075 34.36,21.515 v1(33.388,21.515)
IRQ: J1.4 U1.8 | length 62.4
  Top Layer w0.245: J1.4@3.15,10.25 8.15,10.25 11.3,10.25 15.2,6.35 30.325,6.35 35.475,11.5 v1(37,11.5) ; U1.8 32.702,22.85 33.152,23.3 33.8,23.3 v1(34.25,23.75)
  Bottom Layer w0.245: v1(34.25,23.75) 34.25,25.146 34.966,25.862 37.888,25.862 39.25,24.5 39.25,12.25 38.5,11.5 v1(37,11.5)
NetC5_2: C5.2 U1.30 Y1.1 | length 10.6
  Top Layer w0.245: Y1.1 22.258,11.775 C5.2 23.783,17.882 25.25,19.35 U1.30
NetC6_1: C6.1 U1.16 | length 12.1
  Top Layer w0.245: v1(20.2,27.9) C6.1 ; v1(27,27.6) 28.267,27.6 28.7,27.167 U1.16
  Bottom Layer w0.245: v1@20.221,27.9 23.6,27.9 23.9,27.6 v1(27,27.6)
NetC6_2: C6.2 R1.1 R2.1 | length 2
  Top Layer w0.245: C6.2 R2.1 R1.1
NetC7_1: C7.1 C8.1 C9.2 L1.2 R2.2 | length 4.7
  Top Layer w0.245: R2.2 C7.1 20.262,30.713 22.262,30.713 C9.2 22.275,29.84 21.85,29.415 L1.2
NetC7_2: C7.2 C8.2 C10.2 C11.2 R1.2 R7.1 | length 5.1
  Top Layer w0.245: R7.1 R1.2 C7.2 C8.2 21.263,31.688 22.263,31.688 C11.2 C10.2
NetC12_1: C12.1 U1.29 Y1.3 | length 10.5
  Top Layer w0.245: C12.1 Y1.3@19.707,15.625 ; Y1.3 19.783,15.925 19.783,17.532 20.414,18.164 23.164,18.164 24.85,19.85 U1.29
NetC13_1: C13.1 C16.2 C17.2 L2.2 R15.1 | length 4.7
  Top Layer w0.245: L2.2 25.65,29.415 25.225,29.84 C13.1 25.238,30.713 27.238,30.713 C17.2 R15.1
NetC14_1: C14.1 C15.1 C16.1 C17.1 R10.1 R18.2 | length 5.1
  Top Layer w0.245: C14.1 C15.1 25.238,31.688 28.238,31.688 R18.2 R10.1
NetC18_1: C18.1 U1.15 | length 5.6
  Top Layer w0.245: C18.1 27.334,28.606 27.334,28.166 27.5,28 28.7,28 29.2,27.5 U1.15
NetC18_2: C18.2 R15.2 R18.1 | length 2
  Top Layer w0.245: C18.2@28.24,28.64 C18.2@28.245,28.645 ; R18.1@28.245,30.67 R18.1 R15.2 C18.2
NetC19_2: C19.2 C20.2 U1.26 U1.27 U1.31 | length 12.7
  Top Layer w0.245: C19.2 23.091,21.35 v1(23.968,21.35) 24.846,21.35 ; U1.27 24.989,20.85 24.846,20.994 24.846,21.35 ; U1.26 24.846,21.35 ; C20.2 v1(26.7,17.572) U1.31
  Bottom Layer w0.245: v1(23.968,21.35) 25.4,21.35 26.7,20.05 v1(26.7,17.572)
NetC21_2: C21.2 U1.17 | length 1.3
  Top Layer w0.245: U1.17 C21.2
NetC22_2: C22.2 C23.2 U1.14 U1.18 U1.22 | length 22.6
  Top Layer w0.245: v1(24.8,26.3) C22.2 C23.2 24.728,24.522 25,24.25 25,23.5 25.15,23.35 U1.22 ; v1(26.6,26.9) 26.604,26.9 27.7,25.804 U1.18 ; U1.14 v1(29.7,29.45)
  Bottom Layer w0.245: v1(24.8,26.3) 25.4,26.9 v1(26.6,26.9) 26.6,26.227 26.744,26.084 28.834,26.084 29.7,26.95 v1(29.7,29.45)
NetC24_1: C24.1 U3.6 | length 1.3
  Top Layer w0.5: U3.6 C24.1
NetC24_2: C24.2 L3.1 U3.5 | length 6
  Top Layer w0.55: C24.2@39.449,10.575 L3.1@40.7,10.575
  Top Layer w0.7: U3.5 40.7,7.4 41.05,7.75 L3.1 41.05,10.225 L3.1@40.7,10.575
NetL1_1: L1.1 U1.21 | length 7.3
  Top Layer w0.245: L1.1 24.015,27.985 25.8,26.2 25.8,23.877 25.827,23.85 U1.21
NetL2_1: L2.1 U1.19 | length 4
  Top Layer w0.245: L2.1 25.75,26.85 27.2,25.4 U1.19
NetR7_2: R7.2 R10.2 U2.1 | length 9.2
  Top Layer w0.245: U2.1 20.902,34.598 cw(c20.902,34.25) 21.25,34.25 21.25,33 cw(c20.998,33) 20.998,32.748 R7.2 ; R10.2 v1(27.25,33.6)
  Bottom Layer w0.245: v1(27.25,33.6) v1(27.25,38.39)
NetR25_2: R25.2 TP6.1 U1.2 | length 4.5
  Top Layer w0.245: U1.2 32.69,19.85 33.266,19.274 34.194,19.274 R25.2 34.3,19.274 34.3,18.437 34.89,17.847 TP6.1
NetTP1_1: TP1.1 U1.37 | length 2.8
  Top Layer w0.245: TP1.1 29.7,17.41 U1.37
NetTP2_1: TP2.1 U1.40 | length 3
  Top Layer w0.245: U1.40 31.2,17.89 TP2.1
NetTP3_1: TP3.1 U1.23 | length 8.3
  Top Layer w0.245: TP3.1 20.6,24.937 20.6,24.1 21.1,23.6 24.3,23.6 25.05,22.85 U1.23
NetTP4_1: TP4.1 U1.24 | length 7.3
  Top Layer w0.245: TP4.1 21.086,22.8 24.3,22.8 24.75,22.35 U1.24
NetTP5_1: TP5.1 U1.25 | length 6.9
  Top Layer w0.245: TP5.1 20.135,22.1 24.33,22.1 24.58,21.85 U1.25
NetTP7_1: TP7.1 U1.39 | length 2.4
  Top Layer w0.245: TP7.1 30.695,16.305 30.695,18.645 U1.39
VCC: C25.2 J1.1 U1.13 U1.28 U3.2 U3.3 | length 9.5
  Top Layer w0.245: 23.667,19.567 24.45,20.35 U1.28 ; U1.13 30.2,28.7 30.8,29.3 31.865,29.3 v1(32.599,29.301)
  other v1: 22.368,19.35 23.168,19.35
VEN: J1.3 U1.10 | length 64.6
  Top Layer w0.245: J1.3@3.15,7.75 J1.3@8.15,7.75 ; U1.10 31.9,24.65 32.65,25.4 v1(33.6,25.4)
  Bottom Layer w0.245: J1.3@8.15,7.75 5.85,7.75 5.6,8 5.6,26.9 7.6,28.9 27,28.9 28.4,30.3 33.6,30.3 34.7,29.2 34.7,26.5 v1(33.6,25.4)
pads on no net: U1.11 U1.32 U1.33 U1.34 U1.35 U1.36 U1.38

## Polygon pours and split planes (outlines as drawn)
+3V3 on PWR "+3V3_L03_P010" (solid, pour order 10): 0,31 47.5,31 47.5,0 0,0
VCC on PWR "VCC_L03_P007" (solid, pour order 7): 20.775,17.35 20.775,9.475 19.1,7.8 0.275,7.8 0.275,0.5 25.4,0.5 25.4,18.9 34.25,27.75 34.25,30 31.8,30 31.8,27.05 24.75,20 22,20 21.848,19.848 21.848,18.423
+3V3 on Top Layer "+3V3_L01_P016" (solid, remove dead copper, pour order 16): 44.1,1.3 44.1,6.95 44.05,7 44.05,11.2 46.7,11.2 46.7,1.3
GND on Top Layer "GND_L01_P015" (solid, remove dead copper, pour order 15): 41.9,6.1 41.2,6.8 38.9,6.8 38.9,5.8 38.5,5.4 38.5,1.3 41.9,1.3
VCC on Top Layer "VCC_L01_P013" (solid, remove dead copper, pour order 13): 35.1,5.3 33.9,4.1 1.4,4.1 1.4,1.3 38.1,1.3 38.1,5.4 37.5,5.4 37.5,7.75 35.1,7.75
VCC on Top Layer "VCC_L01_P011" (solid, remove dead copper, pour order 11): 22,20 22,18.7 23.1,18.7 24.1,19.7 24.1,20
GND on GND "GND_L02_P003" (solid, pour order 3): 0,31 47.5,31 47.5,0 0,0

## Silkscreen, mask and mechanical layers (free items; w line width, h text height)
Top Overlay:
  drawing of 48 lines, arcs and shapes, not listed
  text "AD0" at 4.385,19.8 h1.2
  text "AD1" at 4.385,17.3 h1.2
  text "SDA" at 4.385,14.8 h1.2
  text "SCL" at 4.385,12.3 h1.2
  text "IRQ" at 4.385,9.8 h1.2
  text "VEN" at 4.385,7.3 h1.2
  text "GND" at 4.385,4.8 h1.2
  text "VCC" at 4.385,2.3 h1.2
Bottom Overlay:
  text "AD0" at 14.315,18.4 h1.52
  text "AD1" at 14.315,15.9 h1.52
  text "SDA" at 14.315,13.4 h1.52
  text "SCL" at 14.315,10.9 h1.52
  text "IRQ" at 14.315,8.4 h1.52
  text "VEN" at 14.315,5.9 h1.52
  text "GND" at 14.315,3.4 h1.52
  text "VCC" at 14.315,0.9 h1.52
Board Shape:
  the board outline again, w0.4